# Altium PCB RF_Protoboard.PcbDoc
Units mil, origin at the board's own origin, x right, y up, seen from the top; angles counter-clockwise.
Board outline 5000 x 2000 mil, 4 copper layers (Top Layer, Ground Plane, Power Plane, Bottom Layer), stack 62 mil thick; 53 components, 30 nets, 123 pads, 152 vias.
Unrouted connection lines stored in the file: 1.
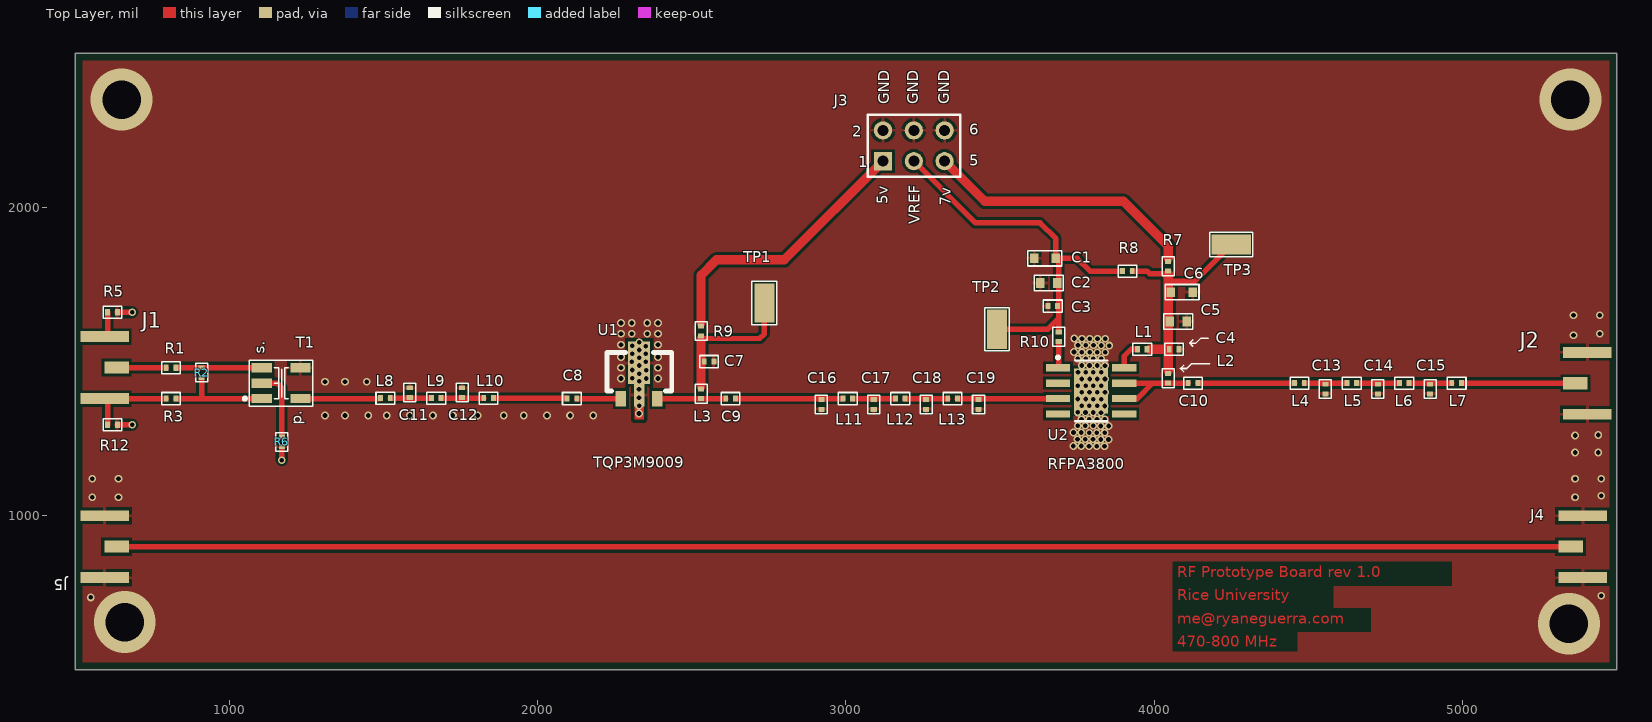
[diagram p0: Top Layer view]
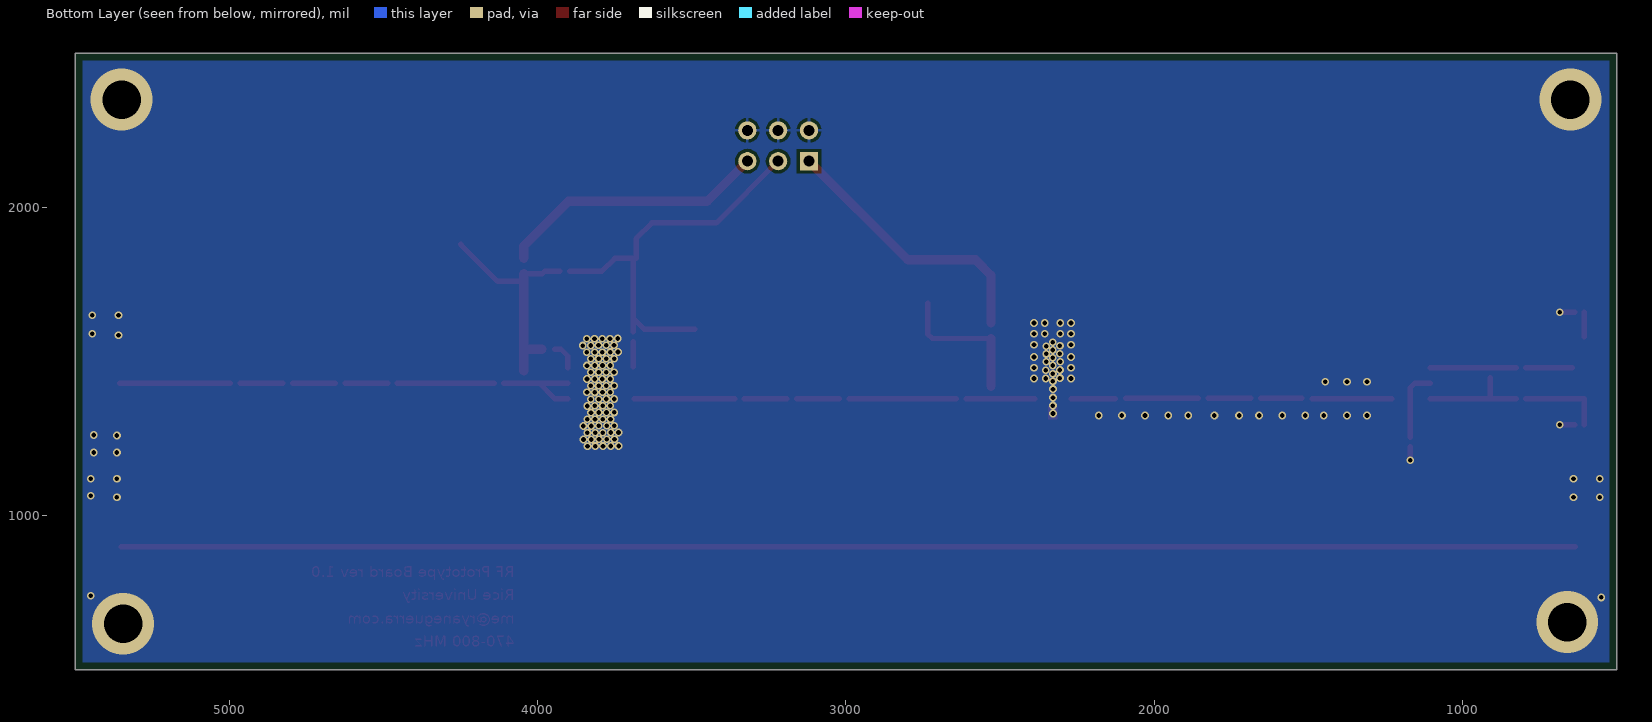
[diagram p1: Bottom Layer view, seen from below]
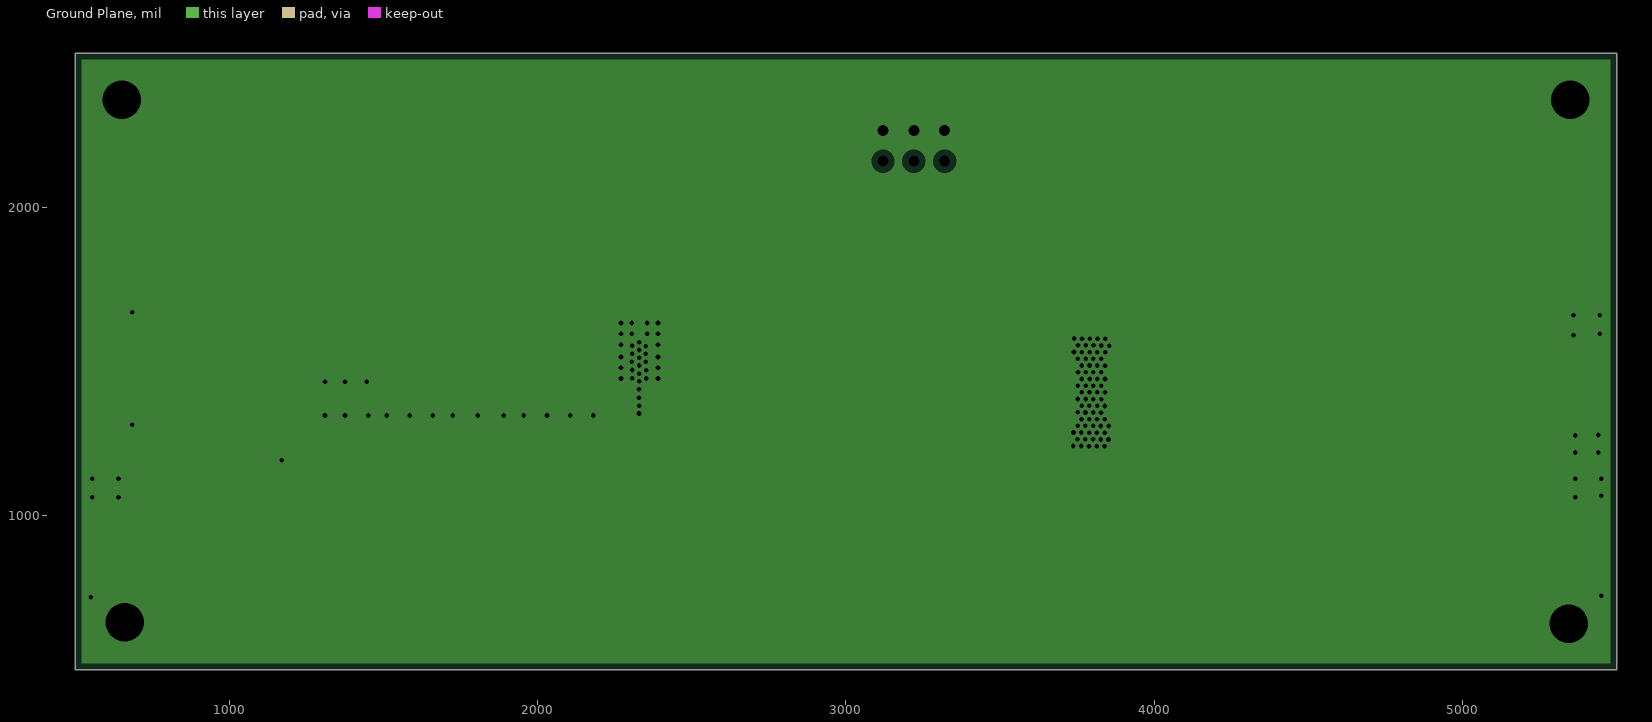
[diagram p2: Ground Plane, clearances drawn from the general rule]
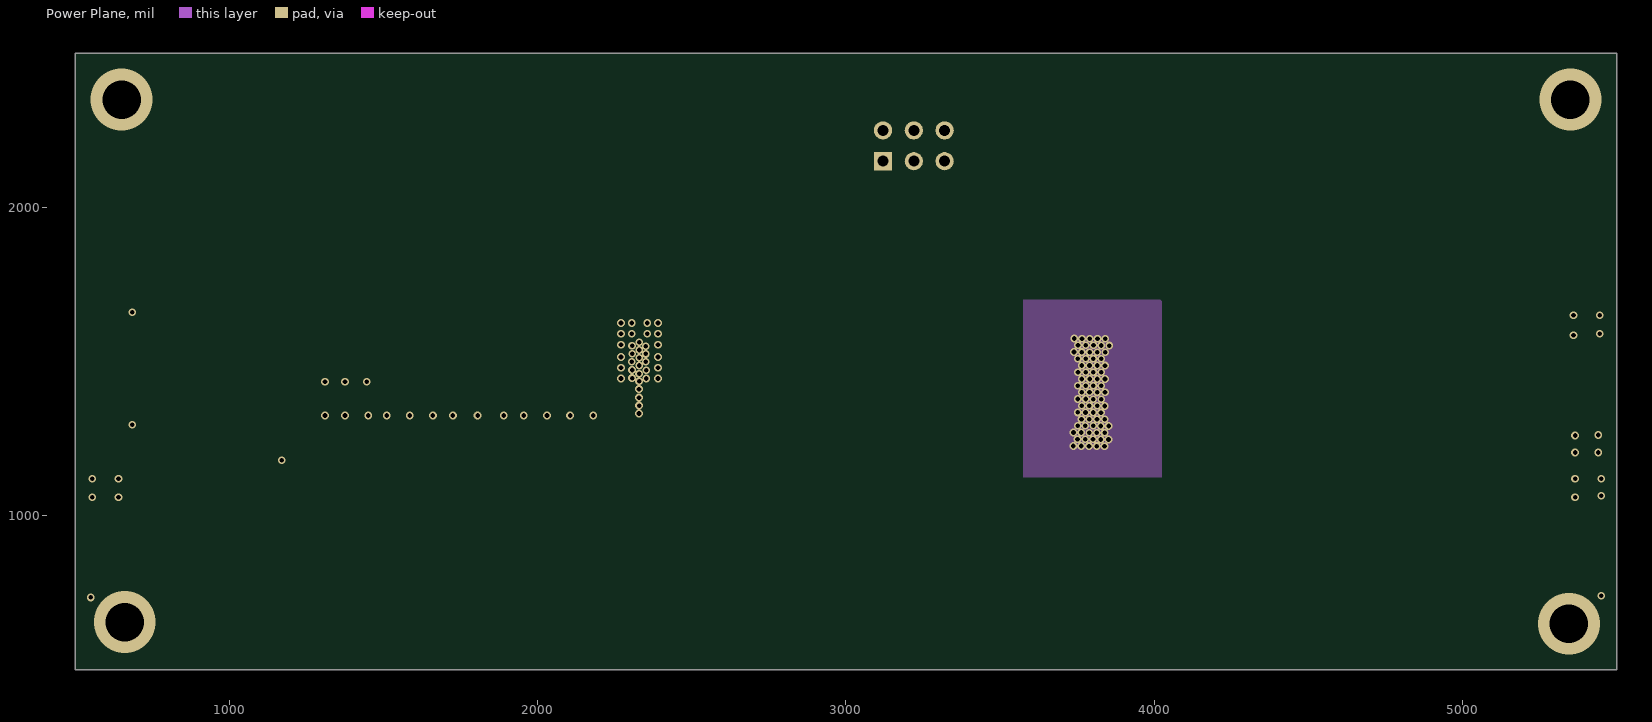
[diagram p3: Power Plane]

## Layer stack, top to bottom
Top Solder: solder mask 0.4, Solder Resist, Dk 4.5
Top Layer: signal copper 1.4
Dielectric1: core 9.2, FR-4, Dk 4.04
Ground Plane: plane copper 1.4
Dielectric3: prepreg 38, FR-4, Dk 4.04
Power Plane: signal copper 1.4
Dielectric2: core 9.2, FR-4, Dk 4.04
Bottom Layer: signal copper 1.4
Bottom Solder: solder mask 0.4, Solder Resist, Dk 4.5

## Board outline
500,2500 5500,2500 5500,500 500,500

## Design rules (kind name [scope] priority, off if disabled: settings)
AssemblyTestPointUsage [All] p1 off:
AssemblyTestpoint [All] p1 off: testpointundercomponent=TRUE minsize=40 maxsize=100 preferedsize=60 minholesize=0 maxholesize=40 preferedholesize=32 testpointgrid=1 usegrid=TRUE gridtolerance=0.01 allowsidetop=TRUE allowsidebottom=TRUE
Clearance [All] p1: gap=10 ignorepadtopadclearanceinfootprint=FALSE except(0: Arc-Hole Track-Hole SMDPad-Hole THPad-Hole Via-Hole Fill-Hole Poly-Hole Region-Hole Text-Hole)
FabricationTestPointUsage [All] p1 off: valid=0 allowmultiple=FALSE
FabricationTestpoint [All] p1 off: side=3 testpointundercomponent=TRUE minsize=40 maxsize=100 preferedsize=60 minholesize=0 maxholesize=40 preferedholesize=32 testpointgrid=1 allowsidetop=TRUE allowsidebottom=TRUE usegrid=TRUE gridtolerance=0.01
HoleSize [All] p1: absolutevalues=TRUE maxlimit=200 minlimit=15 maxpercent=80.000 minpercent=20.000
MinimumAnnularRing [All] p1: minimumring=5
MinimumSolderMaskSliver [All] p1: minsoldermaskwidth=4
NetAntennae [All] p1 off: netantennaetolerance=50
PlaneClearance [All] p1: clearance=20
PlaneConnect PlaneConnectGNDVias [(IsVia AND InNet('GND'))] p1: planeconnectstyle=Direct reliefexpansion=20 reliefentries=4 reliefconductorwidth=10 reliefairgap=10
PlaneConnect PlaneConnect_1 [All] p2: planeconnectstyle=Relief reliefexpansion=10 reliefentries=4 reliefconductorwidth=10 reliefairgap=10
PolygonConnect PolygonConnectGNDVias [All vs (IsVia AND InNet('GND'))] p1: connectstyle=Direct reliefconductorwidth=10 reliefentries=4 polygonreliefangle="90 Angle" airgapwidth=10
PolygonConnect PolygonConnect_1 [All] p2: connectstyle=Relief reliefconductorwidth=10 reliefentries=4 polygonreliefangle="90 Angle" airgapwidth=10
RoutingCorners [All] p1: cornerstyle=Round minsetback=100 maxsetback=100
RoutingVias [All] p1: holewidth=15 width=25 viastyle="Through Hole" minholewidth=15 minwidth=25 maxholewidth=300 maxwidth=300
SilkToSolderMaskClearance SilkscreenOverComponentPads [IsPad] p1: minsilkscreentomaskgap=0.5 clearancetoexposedcopper=TRUE
SolderMaskExpansion [All] p1: expansion=4
Width [All] p1: maxlimit=50 minlimit=17.5 preferedwidth=17.5
19 further rules are at their usual default settings.

## Components (designator, comment, footprint, x,y, rotation, side; value= is the part's Value field where it differs from the comment)
C1 "BP 0805" 0805_SMT 3610,1835 r0 top
C2 "BP 0603" 0603_SMT 3630,1755 r0 top
C3 "BP 0402" 0402_SMT 3655,1680 r0 top
C4 "BP 0402" 0402_SMT 4080,1540 r180 top
C5 "BP 0603" 0603_SMT 4105,1630 r180 top
C6 "BP 1206" 0805_SMT 4125,1725 r180 top
C7 "Cap" 0402_SMT 2540,1500 r0 top
C8 "Cap" 0402_SMT 2095,1380 r0 top
C9 "Cap" 0402_SMT 2610,1380 r0 top
C10 "Cap" 0402_SMT 4110,1430 r0 top
C11 "Cap" 0402_SMT 1585,1415 r270 top
C12 "Cap" 0402_SMT 1755,1415 r270 top
C13 "Cap" 0402_SMT 4555,1395 r90 top
C14 "Cap" 0402_SMT 4725,1395 r90 top
C15 "Cap" 0402_SMT 4895,1395 r90 top
C16 "Cap" 0402_SMT 2920,1345 r90 top
C17 "Cap" 0402_SMT 3090,1345 r90 top
C18 "Cap" 0402_SMT 3260,1345 r90 top
C19 "Cap" 0402_SMT 3430,1345 r90 top
J1 "RF IN" SMA_Edge_Launch 595,1380 r90 top
J2 "RF OUT" SMA_Edge_Launch 5405,1530 r270 top
J3 "Header 3X2" HDR2X3 3120,2150 r0 top
J4 "RF IN" SMA_Edge_Launch 5390,1000 r270 top
J5 "RF OUT" SMA_Edge_Launch 595,799.21 r90 top
L1 "AC Block" 0402_SMT 3945,1540 r0 top
L2 "AC Block" 0402_SMT 4045,1430 r90 top
L3 "Inductor" 0402_SMT 2530,1380 r90 top
L4 "Inductor" 0402_SMT 4455,1430 r0 top
L5 "Inductor" 0402_SMT 4625,1430 r0 top
L6 "Inductor" 0402_SMT 4795,1430 r0 top
L7 "Inductor" 0402_SMT 4965,1430 r0 top
L8 "Inductor" 0402_SMT 1490,1381.5 r0 top
L9 "Inductor" 0402_SMT 1655,1381.5 r0 top
L10 "Inductor" 0402_SMT 1825,1381.5 r0 top
L11 "Inductor" 0402_SMT 2990,1380 r0 top
L12 "Inductor" 0402_SMT 3160,1380 r0 top
L13 "Inductor" 0402_SMT 3330,1380 r0 top
R1 "tune" 0402_SMT 795,1480 r0 top
R2 "tune" 0402_SMT 910,1480 r270 top
R3 "tune" 0402_SMT 795,1380 r0 top
R5 "tune" 0402_SMT 605,1660 r0 top
R6 "tune" 0402_SMT 1170,1255 r270 top
R7 "Bias" 0402_SMT 4045,1825 r270 top
R8 "Jumper" 0402_SMT 3928.5,1793.5 r180 top
R9 "Bias" 0402_SMT 2530,1615 r270 top
R10 "Bias 0402" 0402_SMT 3690,1565 r90 top
R12 "tune" 0402_SMT 605,1295 r0 top
T1 "TC4-14+" AT224-1 1230,1380 r90 top
TP1 "Test_Point" Test_Point 2735,1690 r0 top
TP2 "Test_Point" Test_Point 3490,1605 r0 top
TP3 "Test_Point" Test_Point 4250,1880 r270 top
U1 "TQP3M9009_SOT89" TQP3M9009_SOT-89 2270,1355 r0 top
U2 "RFPA3800" RFPA3800_SOIC-8 3795,1405 r0 top

## Footprints (in the part's own frame and the unit in brackets; to place one, negate y for a bottom-side part, rotate by r counter-clockwise, add the part's x,y. Pads: shape width x height; smd on the part's side, far side on the other; paste and mask are expansions set on the pad)
0402_SMT [mm] "0402 Chip Cap, Res, Ind"
  rect 0.4x0.5 smd: 1(0,0) 2(0.8,0)
  silkscreen extent -0.37,-0.5 1.17,0.5
0603_SMT [mm] "0603 Chip Cap, Res, Ind"
  rect 0.7x0.8 smd: 1(0,0) 2(1.4,0)
  silkscreen extent -0.51,-0.64 1.91,0.64
0805_SMT [mm] "0805 Chip Cap, Res, Ind"
  rect 0.7x0.8 smd: 1(0,0) 2(1.8,0)
  silkscreen extent -0.51,-0.64 2.29,0.64
AT224-1 [mm] "Mini-Circuits AT224-1 Case for TC4-14+"
  rect 0.76x1.65 smd: 1(0,3.18) 2(1.27,3.18) 3(2.54,3.18) 4(2.54,0) 6(0,0)
  silkscreen extent -0.64,-1.02 3.17,4.7
HDR2X3 [mm] "Connector; Header; 3x2 Position"
  rect 1.5x1.5 hole 0.9: 1(0,0)
  round 1.5 hole 0.9: 2(0,2.54) 3(2.54,0) 4(2.54,2.54) 5(5.08,0) 6(5.08,2.54)
  silkscreen extent -1.27,-1.27 6.35,3.81
RFPA3800_SOIC-8 [mm] "SOIC, 8-Leads, Body 5.0x4.0mm (max), Pitch 1.27mm, IPC Medium Density"
  rect 2x0.6 smd: 1(-2.725,1.905) 2(-2.725,0.635) 3(-2.725,-0.635) 4(-2.725,-1.905) 5(2.725,-1.905) 6(2.725,-0.635) 7(2.725,0.635) 8(2.725,1.905)
  rect 2.8x3.7 smd: GND(0,0)
  silkscreen extent -2.85,-2.5 1.32,2.88, body extent -1.99,-2.49 1.99,2.49, height 1.73
SMA_Edge_Launch [mm] "SMA Edge Launch, 1.45mm Board Thickness"
  rect 1x2 smd: 1(2.55,-1)
  rect 0.9x4 smd: GND(0,0) GND(5.1,0)
Test_Point [mm] "Harwin S1751-46R Test Point"
  rect 1.65x3.25 smd: 1(0,0)
  silkscreen extent -1.02,-1.78 1.02,1.78
TQP3M9009_SOT-89 [mm] "SOT-89_Vias_Backplane"
  rect 0.86x1.27 smd: 1(0,0.635) 3(3,0.635)
  rect 0.84x1.85 smd: 2(1.5,0.925)
  rect 1.8x3.48 smd: 2(1.5,3.59)
  Top Layer region: 1.1,-1.1 1.9,-1.1 1.9,0 1.1,0
  silkscreen extent -1.14,1.27 4.19,4.44

## Part data
C1 C2 C3 C4 C5 C6: library part Cap, "Capacitor"
C7 C8 C9 C10 C11 C12 C13 C14 C15 C16 C17 C18 C19: "Capacitor"
J1 J2 J4 J5: library part SMA-Edge-Launch, "Edge-Launch SMA Female"
J3: "Header, 3-Pin, Dual row"
L1 L2: library part Inductor, "Inductor"
R1 R2 R3 R5 R6 R7 R8 R9 R10 R12: library part Res3, "Resistor"
T1: "Mini-Circuits Type A Transformer, 4:1 Ohm, CT"
U1: "Triquint TQP3M9009 Power Amplifier"
U2: "RFMD RFPA3800 Power Amplifier"

## Via types
v1: diameter 25, hole 15, Top Layer to Bottom Layer, tented top, 121 vias
v2: diameter 25, hole 15, Top Layer to Bottom Layer, 27 vias
v3: diameter 200, hole 125, Top Layer to Bottom Layer, 4 vias

## Nets (pads, with @x,y where several pads share a name; then routed paths per layer and width w, separated by ;. In a path a pad name is that pad's centre, name@x,y a point inside that pad or via, vN(x,y) a via of type N, cw(c..) or ccw(c..) an arc to the next point about the centre after c; other vN are vias at no path point)
GND: C1.1 C2.1 C3.1 C4.1 C5.1 C6.1 C7.2 C11.1 C12.1 C13.1 C14.1 C15.1 C16.1 C17.1 C18.1 C19.1 J2.GND J3.2 J3.4 J3.6 J4.GND J5.GND R5.2 R6.2 R12.2 T1.4 U1.2 U2.GND | length 140.5
  Top Layer w17.5: R12.2 v2(685,1295) ; R5.2 v2(685,1660) ; v2(1170,1180) R6.2
  other v1: 550,735 555,1060 640,1060 5365,1060 5450,1065 555,1120 5365,1120 5365,1205 5440,1205 3838.43,1225.49 3737.64,1226.25 3763.03,1226.15 3788.21,1225.9 3813.35,1225.9 3826.27,1247.38 3851.3,1247.18 3750.86,1248.04 3776.05,1247.79 3801.18,1247.79 5365,1260 3788.62,1269.48 3813.75,1269.48 3838.84,1269.07 3738.14,1269.93 3763.43,1269.73 3776.46,1291.37 3801.59,1291.37 3826.67,1290.97 3851.71,1290.81 3751.27,1291.62 3763.94,1313.31 3789.12,1313.06 3814.27,1312.97 3839.34,1312.65 1310,1325 1375,1325 1450,1325 1510,1325 1585,1325 1660,1325 1725,1325 1805,1325 1890,1325 1955,1325 2030,1325 2105,1325 2180,1325 2328.65,1331.66 3751.67,1335.1 3776.71,1334.9 3801.89,1334.75 3826.98,1334.54 3789.53,1356.49 3814.66,1356.49 3839.75,1356.08 3764.34,1356.74 3777.16,1378.48 3802.25,1378.23 3827.53,1378.02 3752.03,1378.63 3764.8,1400.32 3789.88,1400.07 3815.12,1399.97 3840.15,1400.02 3752.23,1422.01 3777.52,1421.86 3802.6,1421.66 3827.74,1421.96 1310,1435 1375,1435 1445,1435 3764.95,1443.6 3790.08,1443.65 3815.12,1443.6 3840.3,1443.6 2270,1445 2390,1445 3752.43,1465.34 3777.47,1465.29 3802.55,1465.34 3827.69,1465.29 2270,1480 2390,1480 3764.75,1487.33 3789.93,1487.08 3815.07,1487.08 3840.2,1487.02 3752.28,1509.12 3777.47,1508.87 3802.6,1508.87 3827.85,1508.77 2270,1515 2390,1515 3840.85,1530.13 3739.76,1531.11 3764.95,1530.81 3790.14,1530.56 3815.27,1530.56 3828.09,1552.15 3854.36,1551.89 3752.69,1552.8 3777.87,1552.55 3803.01,1552.55 2270,1555 2390,1555 3765.71,1574.44 3790.84,1574.44 3815.93,1574.04 3841.01,1573.58 3740.52,1574.7 5360,1585 2270,1590 2305,1590 2355,1590 2390,1590 5445,1590 2270,1625 2305,1625 2355,1625 2390,1625 5360,1650
  other v2: 5450,740 640,1120 5450,1120 5440,1261.95 2328.75,1357.3 2328.55,1383.14 2328.65,1410.71 2328.75,1435.74 2352.01,1444.92 2306.15,1446.44 2328.85,1460.93 2351.76,1472.28 2306.15,1472.84 2329.05,1487.18 2305.44,1499.19 2350.79,1499.75 2328.95,1512.26 2306.45,1524.93 2350.74,1524.83 2328.9,1537.35 2350.54,1549.92 2306.15,1551.28 2328.9,1562.48 5445,1650
  other v3: 5345,650 660,655 650,2350 5350,2350
NetC4_2: C4.2 C5.2 C6.2 L1.2 L2.2 R7.2 R8.1 TP3.1 | length 738.2
  Top Layer w17.5: R8.1 3976.5,1793.5 3985,1785 4045,1785 ; 4045,1760 4130,1760 TP3.1
  Top Layer w30: 3986.5,1540 4035,1540 ; 4045,1470 4045,1760 4045,1785
NetC7_1: C7.1 L3.2 R9.2 TP1.1 | length 466.2
  Top Layer w17.5: 2530,1575 2720,1575 2735,1590 TP1.1
  Top Layer w30: 2530,1420 2530,1575
NetC8_1: C8.1 L10.2 | length 237
  Top Layer w17.5: L10.2 C8.1@2093.5,1381.5
NetC8_2: C8.2 U1.1 | length 143.5
  Top Layer w17.5: C8.2 U1.1
NetC9_1: C9.1 L3.1 U1.3 | length 221.9
  Top Layer w17.5: U1.3 L3.1 C9.1
NetC9_2: C9.2 C16.2 L11.1 | length 348.5
  Top Layer w17.5: C9.2 L11.1
NetC10_1: C10.1 L2.1 U2.6 U2.7 | length 321.1
  Top Layer w17.5: U2.6 3945,1380 3995,1430 ; U2.7 3995,1430 ; C10.1 L2.1 3995,1430
NetC10_2: C10.2 L4.1 | length 313.5
  Top Layer w17.5: C10.2 L4.1
NetC11_2: C11.2 L8.2 L9.1 | length 133.5
  Top Layer w17.5: L8.2 L9.1
NetC12_2: C12.2 L9.2 L10.1 | length 138.5
  Top Layer w17.5: L9.2 L10.1
NetC13_2: C13.2 L4.2 L5.1 | length 138.5
  Top Layer w17.5: L4.2 L5.1
NetC14_2: C14.2 L5.2 L6.1 | length 138.5
  Top Layer w17.5: L5.2 L6.1
NetC15_2: C15.2 L6.2 L7.1 | length 138.5
  Top Layer w17.5: L6.2 L7.1
NetC17_2: C17.2 L11.2 L12.1 | length 138.5
  Top Layer w17.5: L11.2 L12.1
NetC18_2: C18.2 L12.2 L13.1 | length 138.5
  Top Layer w17.5: L12.2 L13.1
NetC19_2: C19.2 L13.2 U2.3 | length 326.2
  Top Layer w17.5: L13.2 U2.3
NetJ1_1: J1.1 R1.1 | length 150.2
  Top Layer w17.5: J1.1@644.37,1480.39 R1.1@794.61,1480.39
NetJ1_GND: J1.GND R3.1 R5.1 R12.1 | length 354.2
  Top Layer w17.5: R12.1 605,1380 R3.1 ; J1.GND@605,1580.79 R5.1
NetJ4_1: J4.1 J5.1 | length 4716.3
  Top Layer w17.5: J5.1 J4.1
NetL1_1: L1.1 U2.8 | length 89.4
  Top Layer w17.5: U2.8 3902.28,1517.28 3925,1540 L1.1
NetR1_2: R1.2 R2.1 T1.3 | length 278.3
  Top Layer w17.5: R1.2 T1.3
NetR2_2: R2.2 R3.2 T1.1 | length 346.8
  Top Layer w17.5: R3.2 910,1380 ; R2.2 910,1380 ; T1.1 910,1380
NetR6_1: R6.1 T1.2 | length 231.4
  Top Layer w17.5: T1.2 1155,1430 1170,1415 R6.1
NetR10_1: R10.1 U2.1 | length 82.7
  Top Layer w17.5: U2.1@3690,1482.28 R10.1
SIGIN: L8.1 T1.6 | length 258.5
  Top Layer w17.5: T1.6 L8.1@1488.5,1380
SIGOUT: J2.1 L7.2 | length 358.7
  Top Layer w17.5: L7.2 J2.1@5355.24,1430
VCC_5V: J3.1 R9.1 | length 898.3
  Top Layer w30: 2530,1625 2530,1780 2580,1830 2800,1830 J3.1
VCC_7V: J3.5 R7.1 | length 878.9
  Top Layer w30: J3.5 3450,2020 3900,2020 4045,1875 4045,1835
VREF: C1.2 C2.2 C3.2 J3.3 R8.2 R10.2 TP2.1 | length 1315.2
  Top Layer w17.5: J3.3 3420,1950 3630,1950 3680.87,1899.13 C1.2 C1.2@3690,1835 ; TP2.1 3655,1605 3690,1640 ; R10.2 3690,1640 ; R8.2 3791.5,1793.5 3750,1835 C1.2@3690,1835 ; 3690,1640 C1.2@3690,1835
pads on no net: U2.2 U2.4 U2.5

## Polygon pours and split planes (outlines as drawn)
GND on Bottom Layer "Component Side-No Net" (solid, pour order 25): 525,2475 5475,2475 5475,525 525,525
GND on Top Layer "Top Layer-No Net" (solid, pour order 26): 525,2475 5475,2475 5475,525 525,525
GND on Top Layer "Component Side-No Net" (solid, pour order 31): 3575,1299.69 3575,1125 4025,1125 4025,1298.88
GND on Top Layer "Component Side-No Net" (solid, pour order 30): 3690,1501.81 3690,1700 4025,1700 4025,1501.81
GND on Top Layer "Component Side-No Net" (solid, pour order 29): 3650,1605 3940,1605 3940,1291.47 3650,1291.47
GND on Power Plane "Component Side-No Net" (solid, pour order 32): 3575,1700 4020,1700 4025,1695 4025,1125 3575,1125
GND on Bottom Solder "Component Side-No Net" (solid): 2180,1700 2475,1700 2475,1225 2180,1225
GND on Bottom Solder "Component Side-No Net" (solid): 3575,1700 4025,1700 4025,1125 3575,1125
no net on Top Solder "Component Side-No Net" (solid): 1280,1400 1280,1360 1465,1360 1465,1400
no net on Top Solder "Component Side-No Net" (solid): 1885,1400 1885,1360 2060,1360 2060,1400
no net on Top Solder "Component Side-No Net" (solid): 2675,1405 2880,1405 2880,1355 2675,1355
no net on Top Solder "Component Side-No Net" (solid): 3465,1400 3465,1360 3625,1360 3625,1400
no net on Top Solder "Component Side-No Net" (solid): 4170,1450 4170,1410 4425,1410 4425,1450
no net on Top Solder "Component Side-No Net" (solid): 5025,1450 5025,1410 5310,1410 5310,1450
no net on Top Solder "Component Side-No Net" (solid): 880,1400 880,1360 1055,1360 1055,1400
no net on Top Solder "Component Side-No Net" (solid): 940,1500 940,1460 1055,1460 1055,1500
no net on Top Solder "Component Side-No Net" (solid): 4170,1400 4170,1360 4425,1360 4425,1400
no net on Top Solder "Component Side-No Net" (solid): 3465,1450 3465,1410 3625,1410 3625,1450
no net on Top Solder "Component Side-No Net" (solid): 2660,1345 2890,1345 2890,1305 2660,1305
no net on Top Solder "Component Side-No Net" (solid): 1280,1350 1280,1310 1465,1310 1465,1350
GND on Ground Plane (split plane): 5479.9,520.1 520.1,520.1 520.1,2479.9 5479.9,2479.9

## Other copper
Top Layer:
  text "RF Prototype Board rev 1.0" at 4075,800 h35
  text "Rice University" at 4075,725 h35
  text "me@ryaneguerra.com" at 4075,650 h35
  text "470-800 MHz" at 4075,575 h35

## Silkscreen, mask and mechanical layers (free items; w line width, h text height)
Top Overlay:
  lines w5: 4095.06,1467.52 4085.06,1477.52 ; 4095.06,1487.52 4085.06,1477.52 ; 4125,1550 4115,1560 ; 4125,1570 4115,1560 ; 4175,1575 4150,1575 4135,1560 4115,1560 ; 4180.34,1492.52 4120.06,1492.52 4105.06,1477.52 4085.06,1477.52
  text "GND" at 3140,2335 h35 r90
  text "GND" at 3235,2335 h35 r90
  text "GND" at 3335,2335 h35 r90
  text "5v" at 3135,2010 h35 r90
  text "7v" at 3340,2005 h35 r90
  text "VREF" at 3240,1945 h35 r90
  text "TQP3M9009" at 2180,1155 h35
  text "RFPA3800" at 3655,1150 h35

## Dimensions
500,2500 to 5500,2500 on Mechanical 13
5500,2500 to 5500,500 on Mechanical 13

## Text inside footprints (layer, text, board x,y; h text height)
J3: Top Overlay "6" at 3400,2235 h35; Top Overlay "5" at 3400,2135 h35; Top Overlay "2" at 3020,2230 h35; Top Overlay "1" at 3040,2130 h35
T1: Top Overlay "p." at 1235,1295 h35 r90; Top Overlay "s." at 1115,1525 h35 r90